# EAGLE board mrShark 04.a (EAGLE 6.1)

Size 25 x 27 mm. Coordinates in mm from the lower left corner, seen from the top.
Outline: 3,0 22,0 25,3 25,24 22,27 3,27 0,24 0,3 3,0
Copper layers (1*16): Top 0.035mm / dielectric 1.5mm / Bottom 0.035mm
Design rules: minimum track width 10mil, minimum drill 24mil, track to track 8mil, track to pad 8mil, pad to pad 8mil, via to via 8mil, smd to smd 8mil, copper to edge 40mil, drill to drill 8mil, minimum pad ring 10mil, minimum via ring 8mil, stop-mask expansion 4mil, vias tented up to drill 0mil, thermal gap 10mil
bRestrict: area 10.4,21.6 to 14.6,24.7; area 19.2,11.9 to 22.6,15.5; area 2.4,11.3 to 5.8,15.2; area 10.4,2.7 to 14.6,5.5

## Footprints (pad centres in the part's own frame; a part is rotated, then mirrored left to right if it is on the bottom)
1,6/0,9 = drill 0.914 pad 1.6 octagon: 1 0,0
C0201 = smd 0.25 x 0.35: 1 -0.25,0; 2 0.25,0
7852-2X6 = smd 0.5 x 1.8: 1 -2,-1.8; 2 -2,1.8; 3 -1.2,-1.8; 4 -1.2,1.8; 5 -0.4,-1.8; 6 -0.4,1.8; 7 0.4,-1.8; 8 0.4,1.8; 9 1.2,-1.8; 10 1.2,1.8; 11 2,-1.8; 12 2,1.8
1X04SMD/90 = smd 1.016 x 1.778: 1 -1.27,-5.08; 2 1.27,-5.08; 3 3.81,-5.08; 4 6.35,-5.08
1,5 = hole 0.6: 0,0
MLF32 = smd 0.7 x 0.3: 1 -2.35,1.75; 2 -2.35,1.25; 3 -2.35,0.75; 4 -2.35,0.25; 5 -2.35,-0.25; 6 -2.35,-0.75; 7 -2.35,-1.25; 8 -2.35,-1.75; 17 2.35,-1.75; 18 2.35,-1.25; 19 2.35,-0.75; 20 2.35,-0.25; 21 2.35,0.25; 22 2.35,0.75; 23 2.35,1.25; 24 2.35,1.75 | smd 0.3 x 0.7: 9 -1.75,-2.35; 10 -1.25,-2.35; 11 -0.75,-2.35; 12 -0.25,-2.35; 13 0.25,-2.35; 14 0.75,-2.35; 15 1.25,-2.35; 16 1.75,-2.35; 25 1.75,2.35; 26 1.25,2.35; 27 0.75,2.35; 28 0.25,2.35; 29 -0.25,2.35; 30 -0.75,2.35; 31 -1.25,2.35; 32 -1.75,2.35
S-PDSO-N10 = smd 0.28 x 0.85: 1 -1,-1.475; 2 -0.5,-1.475; 3 0,-1.475; 4 0.5,-1.475; 5 1,-1.475; 6 1,1.475; 7 0.5,1.475; 8 0,1.475; 9 -0.5,1.475; 10 -1,1.475 | smd 2.4 x 1.65: PP 0,0 | smd 3.8 x 0.28: PP@1 0,0.275; PP@2 0,-0.275
SO-08 = smd 0.6 x 2.2: 1 -1.905,-2.6; 2 -0.635,-2.6; 3 0.635,-2.6; 4 1.905,-2.6; 5 1.905,2.6; 6 0.635,2.6; 7 -0.635,2.6; 8 -1.905,2.6
TFBS4711 = smd 0.635 x 1.27: 1 2.37,0.72; 2 1.42,0.72; 3 0.47,0.72; 4 -0.48,0.72; 5 -1.43,0.72; 6 -2.38,0.72
PLCC6 = smd 0.9 x 0.5: 1 1.25,-0.9; 2 1.25,0; 3 1.25,0.9; 4 -1.25,0.9; 5 -1.25,0; 6 -1.25,-0.9
MEMS = smd 1.2 x 0.9: 1 -1.27,-1.05; 2 1.27,-1.05; 3 1.27,1.05; 4 -1.27,1.05
R0201 = smd 0.28 x 0.43: 1 -0.255,0; 2 0.255,0
CTS-219-02 = smd 1.13 x 2.44: 1 -1.27,-4.3; 2 1.27,-4.3; 3 1.27,4.3; 4 -1.27,4.3
SOT363_INFINEON = smd 0.3 x 0.7: 1 -0.65,-0.8; 2 0,-0.8; 3 0.65,-0.8; 4 0.65,0.8; 5 0,0.8; 6 -0.65,0.8
SOD323-R = smd 0.6 x 0.6: A 1.1,0; C -1.1,0

## Placement (x,y rotation side)
BAT1+  [1,6/0,9]  7.47,14.68 0 top
BAT1-  [1,6/0,9]  7.47,17.22 0 top
BAT2+  [1,6/0,9]  7.47,12.14 0 top
BAT2-  [1,6/0,9]  7.47,9.6 0 top
C1  100n  [C0201]  10.16,13.97 270 bottom
C2  100n  [C0201]  16.26,14.48 270 bottom
CON1  7852-2X6SMT  [7852-2X6]  29.97,14.73 0 top
CON2  [1X04SMD/90]  0.66,10.86 90 top
H1  MOUNT-HOLE1,5  [1,5]  2.68,2.68 0 top
H2  MOUNT-HOLE1,5  [1,5]  22.32,2.68 0 top
H3  MOUNT-HOLE1,5  [1,5]  22.32,24.32 0 top
H4  MOUNT-HOLE1,5  [1,5]  2.68,24.32 0 top
IC1  MEGA48/88/168-MU  [MLF32]  13.21,14.48 180 bottom
IC2  DRV8830DGQRWSON  [S-PDSO-N10]  18.29,7.62 90 top
IC3  TIR1000PSR  [SO-08]  -9.91,22.61 0 top  (outside the outline)
IC4  TFBS4711TR1  [TFBS4711]  -9.4,29.97 180 top  (outside the outline)
LED1  ASMT-YTD2-0BB02  [PLCC6]  4.01,13.36 90 bottom
LED2  ASMT-YTD2-0BB02  [PLCC6]  12.45,23.01 180 bottom
LED3  ASMT-YTD2-0BB02  [PLCC6]  20.88,13.61 270 bottom
LED4  ASMT-YTD2-0BB02  [PLCC6]  12.55,4.11 0 bottom
MOT1  [1,6/0,9]  21.59,8.13 0 top
MOT2  [1,6/0,9]  21.59,6.35 0 top
Q1  ASFLM1-1.8432MHZ-L-C-T  [MEMS]  10.92,19.3 180 bottom
R1  1k  [R0201]  12.95,11.18 90 bottom
S1  MCEMR-02-T  [CTS-219-02]  11.02,3.2 90 top
T2  UMX3NTR  [SOT363_INFINEON]  9.25,23.32 90 bottom
T3  UMX3NTR  [SOT363_INFINEON]  15.75,3.66 270 bottom
U$1  PMEG2010EAR  [SOD323-R]  4.22,18.49 180 top
U$2  PMEG2010EAR  [SOD323-R]  4.22,8.03 180 top

## Library data of the parts
BAT1+ BAT1- BAT2+ BAT2- MOT1 MOT2 = wirepad
C1 C2 R1 = rcl
CON1 = w+p; CONTACTS: 12; LOC_PEGS: 00; PACKAGING: FST; PLATING: 00; SERIENS: 7852
CON2 = pinhead-2
H1-H4 = holes
IC1 = avr-6
IC2 IC3 = texas
IC4 = vishay
LED1-LED4 = led
Q1 = crystal
S1 = switch-dil
T2 T3 = transistor-small-signal
U$1 U$2 = diode

## Nets
BAT1+: BAT1+.1 CON2.3 S1.3
BAT1-: BAT1-.1 CON2.4 U$1.C
BAT2+: BAT2+.1 CON2.2 S1.4
BAT2-: BAT2-.1 CON2.1 U$2.C
CLK: IC1.7 IC3.1 Q1.3
GND: C1.2 C2.2 IC1.3 IC1.5 IC1.21 IC2.5 IC2.7 IC2.8 IC2.PP IC2.PP@1 IC2.PP@2 IC3.4 IC3.5 IC4.6 Q1.2 U$1.A U$2.A
INT0: IC1.32
INT1: IC1.1
IR_SD: IC1.2 IC4.4
LED1: IC1.23 T2.2
LED1+: LED1.4 LED1.5 LED1.6 T2.1
LED2: IC1.24 T2.3
LED2+: LED2.4 LED2.5 LED2.6 T2.5
LED3: IC1.25 T3.2
LED3+: LED3.4 LED3.5 LED3.6 T3.1
LED4: IC1.26 T3.3
LED4+: LED4.4 LED4.5 LED4.6 T3.5
LED_B: IC1.11 LED1.1 LED2.1 LED3.1 LED4.1
LED_G: IC1.10 LED1.2 LED2.2 LED3.2 LED4.2
LED_R: IC1.9 LED1.3 LED2.3 LED3.3 LED4.3
MISO: IC1.16
MOSI: IC1.15
N$1: CON1.1
N$2: CON1.3
N$3: CON1.5
N$4: CON1.7
N$5: CON1.9
N$6: CON1.11
N$7: CON1.2
N$8: CON1.4
N$9: CON1.6
N$10: CON1.8
N$11: CON1.10
N$12: CON1.12
N$14: C2.1 IC1.20
N$15: IC2.3 MOT1.1
N$16: IC2.1 MOT2.1
RESET: IC1.29 R1.2
RXD: IC1.30 IC3.3
RXIR: IC3.6 IC4.3
SCK: IC1.17
SCL: IC1.28 IC2.10
SDA: IC1.27 IC2.9
TXD: IC1.31 IC3.2
TXIR: IC3.7 IC4.2
VCC: C1.1 IC1.4 IC1.6 IC1.18 IC2.4 IC3.8 IC4.5 Q1.1 Q1.4 R1.1 S1.1 S1.2 T2.4 T2.6 T3.4 T3.6

## Tracks (layer width: path | path; a pad name or v marks a point on that pad's centre or on a via)
BAT1+  (2 unrouted)
BAT1-  (2 unrouted)
BAT2+  (2 unrouted)
BAT2-  (2 unrouted)
CLK  (2 unrouted)
GND  (16 unrouted)
IR_SD  (1 unrouted)
LED1  (1 unrouted)
LED1+  (3 unrouted)
LED2  (1 unrouted)
LED2+  (3 unrouted)
LED3  (1 unrouted)
LED3+  (3 unrouted)
LED4  (1 unrouted)
LED4+  (3 unrouted)
LED_B  (4 unrouted)
LED_G  (4 unrouted)
LED_R  (4 unrouted)
N$14  (1 unrouted)
N$15  (1 unrouted)
N$16  (1 unrouted)
RESET  (1 unrouted)
RXD  (1 unrouted)
RXIR  (1 unrouted)
SCL  (1 unrouted)
SDA  (1 unrouted)
TXD  (1 unrouted)
TXIR  (1 unrouted)
VCC  (15 unrouted)